# Altium PCB Analog Circuit.PcbDoc
Units mm, origin at the board's own origin, x right, y up, seen from the top; angles counter-clockwise.
Board outline 143.25 x 119.5 mm, 2 copper layers (Top Layer, Bottom Layer); 53 components, 17 nets, 152 pads, 34 vias.
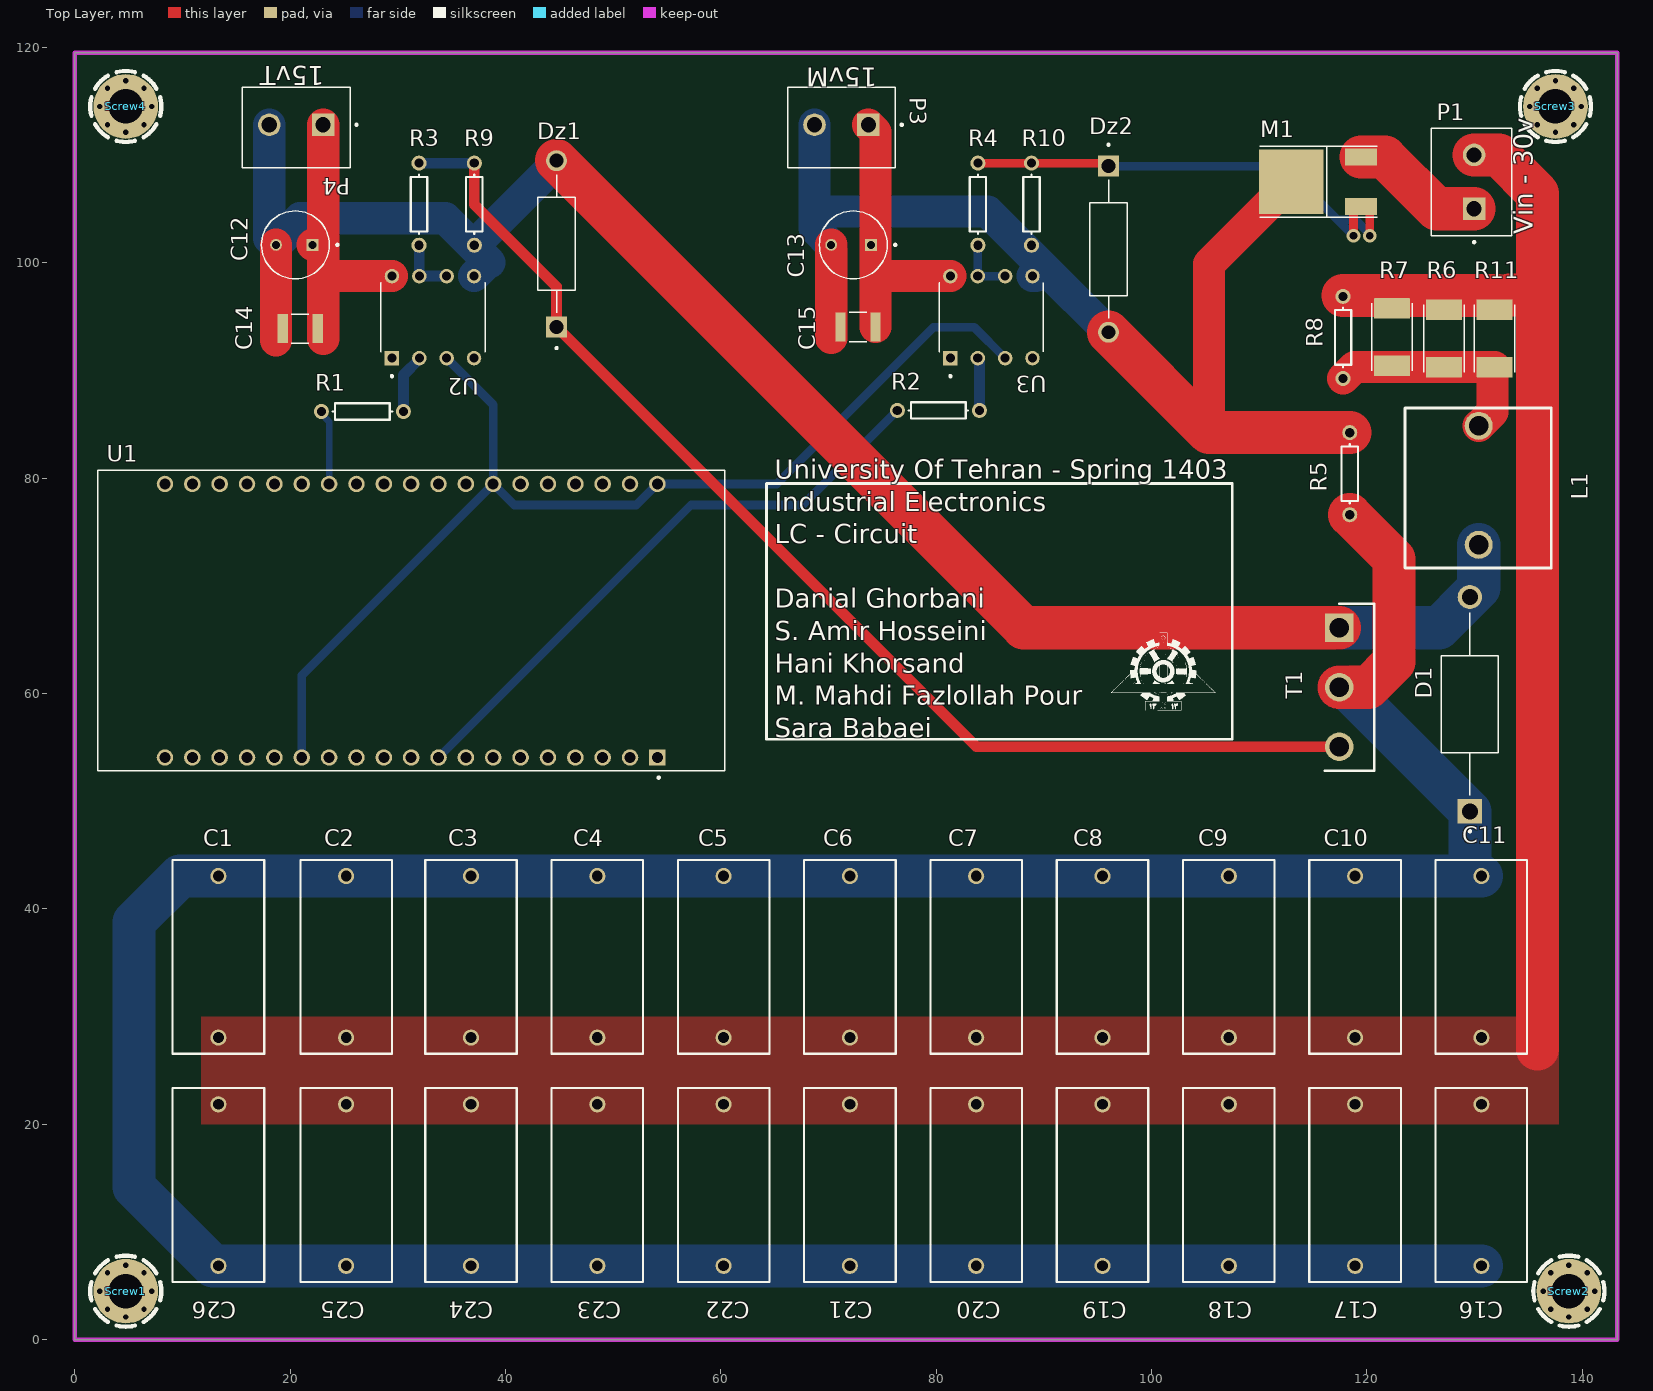
[diagram p0: Top Layer view]
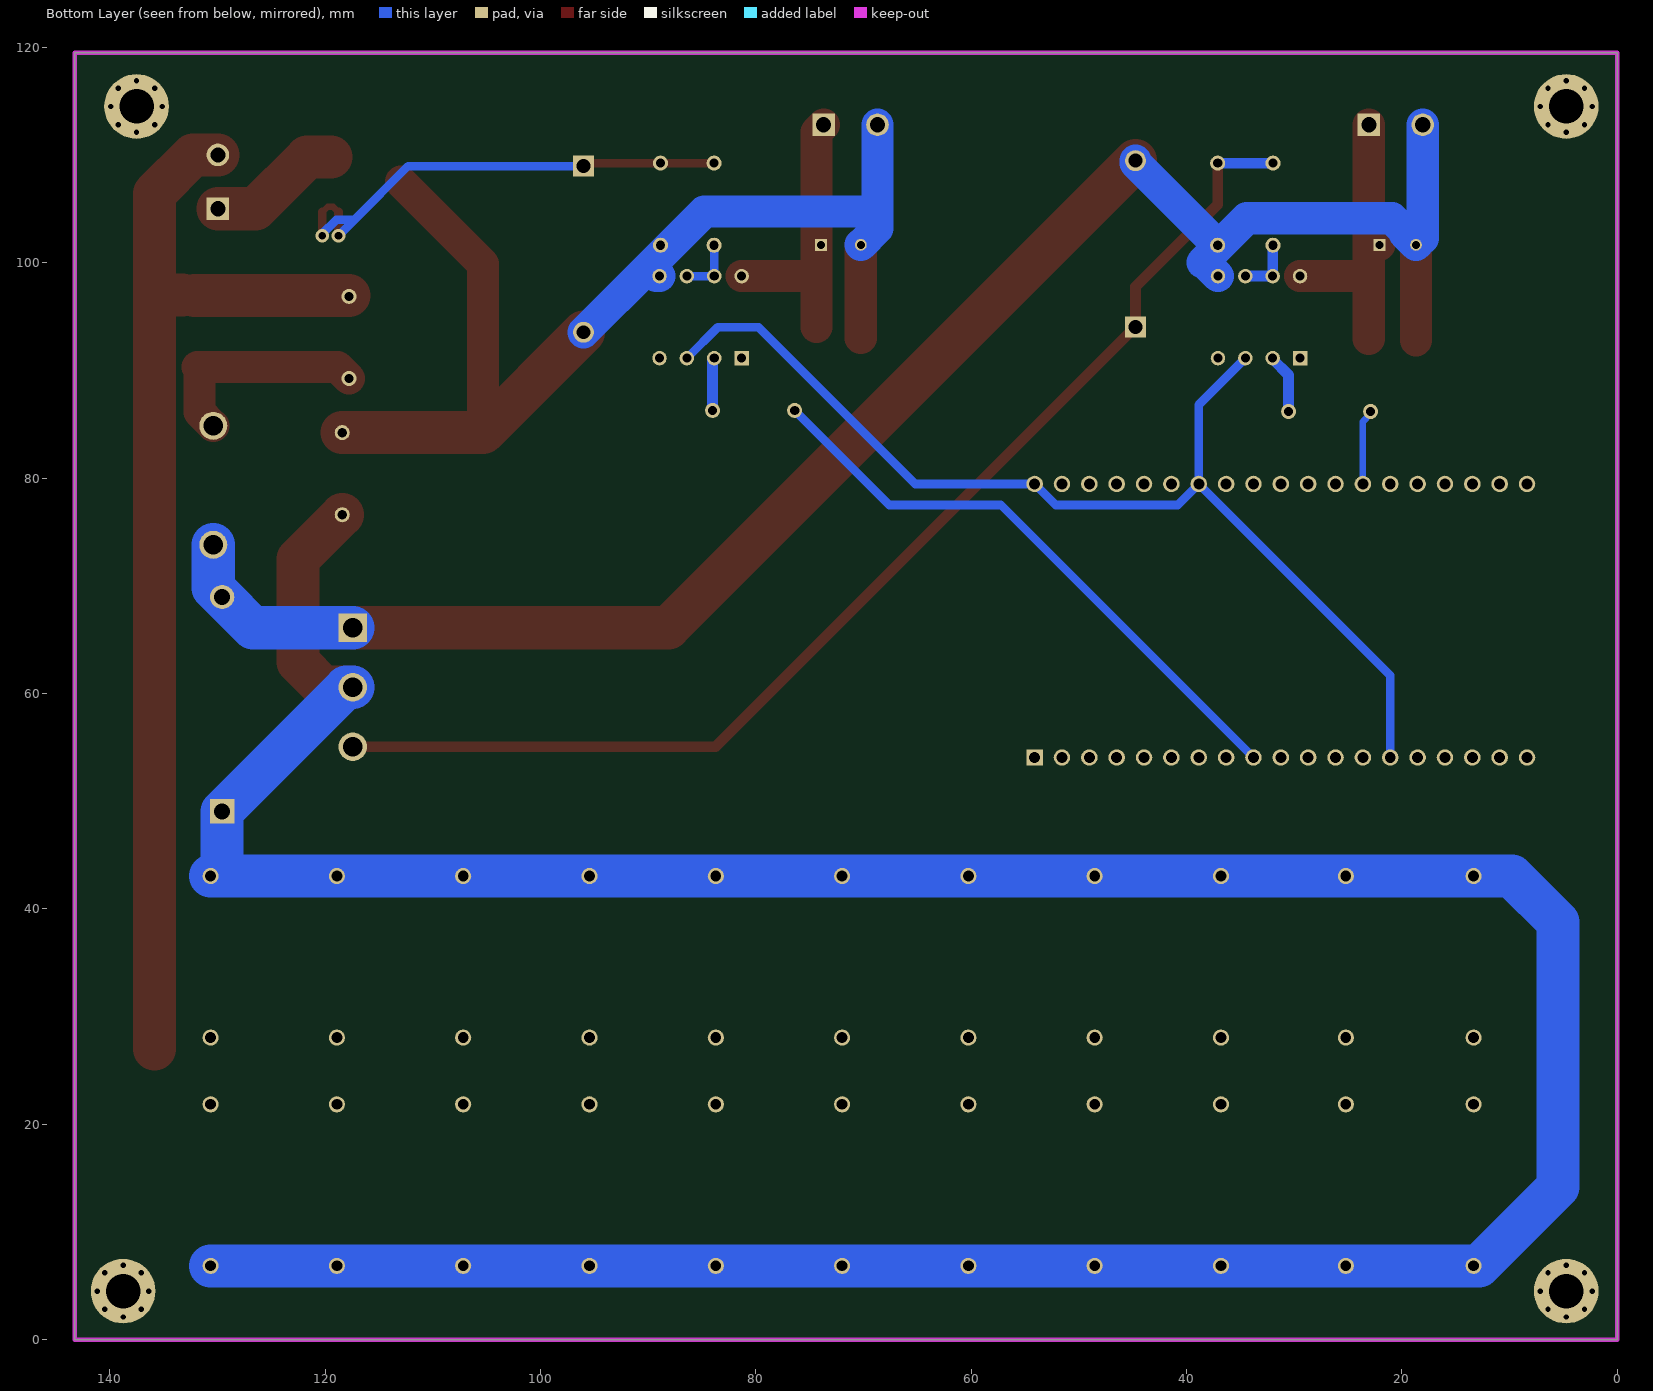
[diagram p1: Bottom Layer view, seen from below]
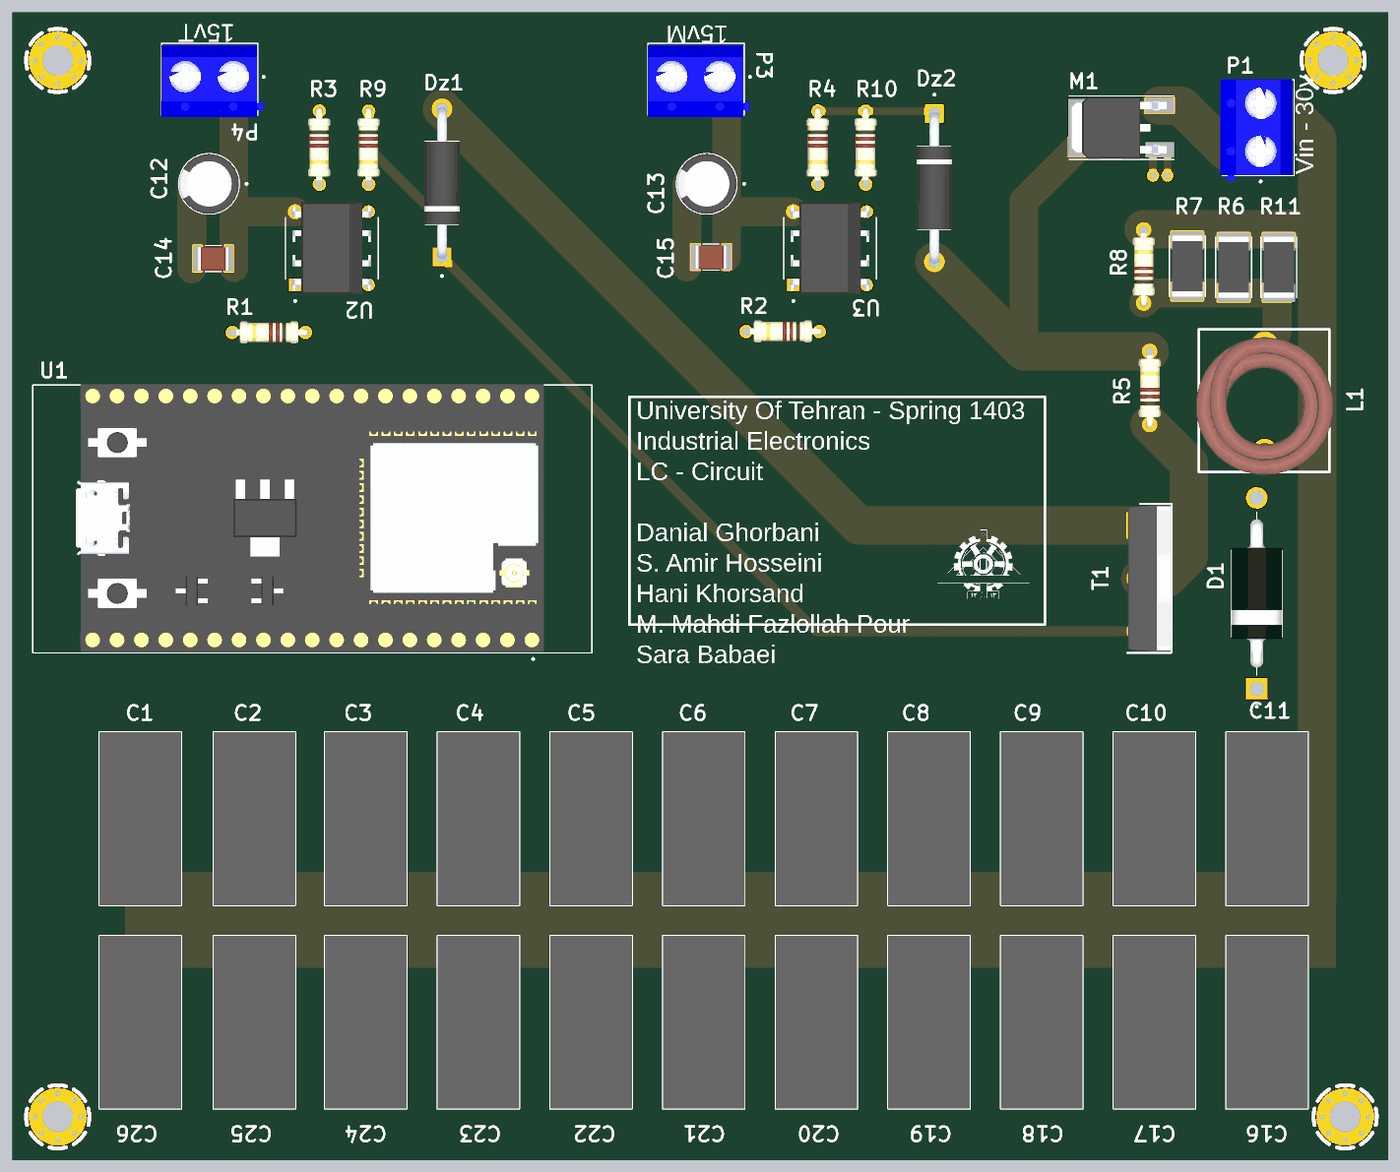
[diagram p2: 3D render of the assembled board from above, using the file's embedded part models]

## Layer stack, top to bottom
Top Solder: solder mask 0.0102, Solder Resist, Dk 3.5
Top Layer: signal copper 0.0356
Dielectric 1: dielectric 0.32, FR-4, Dk 4.8
Bottom Layer: signal copper 0.0356
Bottom Solder: solder mask 0.0102, Solder Resist, Dk 3.5

## Board outline
0,0 0,119.5 143.25,119.5 143.25,0

## Design rules (kind name [scope] priority, off if disabled: settings)
Clearance [All] p1: gap=0.3 ignorepadtopadclearanceinfootprint=FALSE
PlaneConnect [All] p1: planeconnectstyle=Direct reliefexpansion=0.508 reliefentries=4 reliefconductorwidth=0.254 reliefairgap=0.254
PolygonConnect [All] p1: connectstyle=Direct reliefconductorwidth=0.254 reliefentries=4 polygonreliefangle="90 Angle" airgapwidth=0.254
RoutingVias [All] p1: holewidth=0.711 width=1.27 viastyle="Through Hole" minholewidth=0.711 minwidth=1.27 maxholewidth=0.711 maxwidth=1.27
SolderMaskExpansion [All] p1: expansion=0.102 istentingtop=FALSE
Width Power [(InNet('Vin') OR InNet('+15V_iso1') OR InNet('+15V_iso2') OR InNet('Source_M') OR InNet('GND') OR InNet('Cathode_T') OR InNet('NetL1_2') OR InNet('LCT'))] p1: maxlimit=6 minlimit=3 preferedwidth=4
Width General [All] p2: maxlimit=1 minlimit=0.6 preferedwidth=0.8
29 further rules are at their usual default settings.

## Components (designator, comment, footprint, x,y, rotation, side; value= is the part's Value field where it differs from the comment)
C1 "6.8 uF" "63V MKT" 13.354,28.042 r90 top
C2 "6.8 uF" "63V MKT" 25.212,28.042 r90 top
C3 "6.8 uF" "63V MKT" 36.808,28.042 r90 top
C4 "6.8 uF" "63V MKT" 48.534,28.042 r90 top
C5 "6.8 uF" "63V MKT" 60.261,28.042 r90 top
C6 "6.8 uF" "63V MKT" 71.988,28.042 r90 top
C7 "6.8 uF" "63V MKT" 83.715,28.042 r90 top
C8 "6.8 uF" "63V MKT" 95.442,28.042 r90 top
C9 "6.8 uF" "63V MKT" 107.168,28.042 r90 top
C10 "6.8 uF" "63V MKT" 118.895,28.042 r90 top
C11 "6.8 uF" "63V MKT" 130.622,28.042 r90 top
C12 "100uF" "Cap 100uF"#1 20.5,101.65 r180 top
C13 "100uF" "Cap 100uF"#2 72.3,101.65 r180 top
C14 "100nf" "Cap 1210" 20.943,93.85 r0 top
C15 "100nf" "Cap 1210" 72.743,94 r0 top
C16 "6.8 uF" "63V MKT" 130.622,21.849 r270 top
C17 "6.8 uF" "63V MKT" 118.895,21.849 r270 top
C18 "6.8 uF" "63V MKT" 107.168,21.849 r270 top
C19 "6.8 uF" "63V MKT" 95.442,21.849 r270 top
C20 "6.8 uF" "63V MKT" 83.715,21.849 r270 top
C21 "6.8 uF" "63V MKT" 71.988,21.849 r270 top
C22 "6.8 uF" "63V MKT" 60.261,21.849 r270 top
C23 "6.8 uF" "63V MKT" 48.534,21.849 r270 top
C24 "6.8 uF" "63V MKT" 36.808,21.849 r270 top
C25 "6.8 uF" "63V MKT" 25.212,21.849 r270 top
C26 "6.8 uF" "63V MKT" 13.354,21.849 r270 top
D1 "SR360" SR360 129.55,59 r90 top
Dz1 "zener" zener 44.75,101.75 r270 top
Dz2 "zener" zener 96,101.25 r90 top
L1 "13.5 uH" Inductor 130.25,78.5 r90 top
M1 "20N06" 20N06 112.95,107.5 r90 top
P1 "Vin - 30v" Connector 129.95,107.5 r90 top
P3 "15vM" Connector 71.2,112.8 r180 top
P4 "15vT" Connector 20.575,112.8 r180 top
R1 "820" "Res DIP" 26.772,86.15 r180 top
R2 "820" "Res DIP" 80.25,86.25 r180 top
R3 "1k" "Res DIP" 32.005,105.475 r270 top
R4 "15R" "Res DIP" 83.9,105.475 r270 top
R5 "Res1" "Res DIP" 118.375,80.35 r90 top value=10R
R6 "0.01 R" "Res 2512" 127.147,92.935 r90 top
R7 "0.01 R" "Res 2512" 122.321,93.062 r90 top
R8 "0.1 R" "Res DIP" 117.75,93 r90 top
R9 "20k" "Res DIP" 37.137,105.475 r270 top
R10 "20k" "Res DIP" 88.875,105.475 r270 top
R11 "0.01 R" "Res 2512" 131.846,92.935 r90 top
Screw1 "Screw" Screw 4.75,4.5 r0 top
Screw2 "Screw" Screw 138.75,4.5 r0 top
Screw3 "Screw" Screw 137.5,114.5 r0 top
Screw4 "Screw" Screw 4.75,114.5 r0 top
T1 "BTW68" BTW68 117.425,66.1 r270 top
U1 "ESP" ESP 31.25,66.75 r270 top
U2 "TLP250" TLP250 33.25,94.94 r90 top
U3 "TLP250" TLP250 85.105,94.94 r90 top

## Footprints (in the part's own frame and the unit in brackets; to place one, negate y for a bottom-side part, rotate by r counter-clockwise, add the part's x,y. Pads: shape width x height; smd on the part's side, far side on the other; paste and mask are expansions set on the pad)
20N06 [mm]
  rect 1.6x3 smd: 1(-2.3,-6.5) 3(2.3,-6.5)
  rect 6x6 smd: 2(0,0)
  silkscreen extent -3.3,-8 3.3,2.92, body extent -3.27,-7.24 3.27,2.67, height 2.39
"63V MKT" [mm]
  round 1.5 hole 1: 1(0,0) 2(15,0)
  silkscreen extent -1.5,-4.25 16.5,4.25, body extent -1.5,-4.25 16.5,4.25, height 14.6
BTW68 [mm]
  rect 2.655x2.655 hole 1.77: 1(0,0)
  round 2.655 hole 1.77: 2(5.525,0) 3(11.05,0)
  silkscreen extent -2.22,-1.35 13.28,3.25, body extent -2.12,-1.3 13.18,3.2, height 21.54
"Cap 100uF"#1 [mm]
  rect 1.1x1.1 hole 0.75: 1(-1.6,0)
  round 1.1 hole 0.75: 2(1.8,0)
  silkscreen extent -4,-3.15 3.15,3.15, body extent -3.15,-3.15 3.15,3.15, height 11.2
"Cap 100uF"#2 [mm]
  rect 1.1x1.1 hole 0.75: 1(-1.65,0)
  round 1.1 hole 0.75: 2(2.05,0)
  silkscreen extent -4,-3.15 3.15,3.15, body extent -3.15,-3.15 3.15,3.15, height 11.2
"Cap 1210" [mm] "SMD Ceramic 1210"
  rect 0.96x2.72 smd: 1(-1.625,0.025) 2(1.625,0.025)
  silkscreen extent -0.82,-1.32 0.82,1.38, body extent -1.6,-1.25 1.6,1.25, height 2.2
Connector [mm]
  rect 2.1x2.1 hole 1.4: 1(-2.5,0)
  round 2.1 hole 1.4: 2(2.5,0)
  silkscreen extent -5.7,-3.5 5,4, body extent -5.55,-3.31 5.05,4.19, height 10
ESP [mm]
  rect 1.53x1.53 / inner round 1.53 / far side rect 1.53x1.53 hole 1.02: 1(12.7,22.86)
  round 1.53 hole 1.02: 2(12.7,20.32) 3(12.7,17.78) 4(12.7,15.24) 5(12.7,12.7) 6(12.7,10.16) 7(12.7,7.62) 8(12.7,5.08) 9(12.7,2.54) 10(12.7,0) 11(12.7,-2.54) 12(12.7,-5.08) 13(12.7,-7.62) 14(12.7,-10.16) 15(12.7,-12.7) 16(12.7,-15.24) 17(12.7,-17.78) 18(12.7,-20.32) 19(12.7,-22.86) 20(-12.7,-22.86) 21(-12.7,-20.32) 22(-12.7,-17.78) 23(-12.7,-15.24) 24(-12.7,-12.7) 25(-12.7,-10.16) 26(-12.7,-7.62) 27(-12.7,-5.08) 28(-12.7,-2.54) 29(-12.7,0) 30(-12.7,2.54) 31(-12.7,5.08) 32(-12.7,7.62) 33(-12.7,10.16) 34(-12.7,12.7) 35(-12.7,15.24) 36(-12.7,17.78) 37(-12.7,20.32) 38(-12.7,22.86)
  silkscreen extent -13.95,-29.09 14.67,29.11, body extent -14.06,-24.63 13.84,24.12, height 7.85
Inductor [mm]
  round 2.6 hole 1.8: 1(-4.699,-0.127) 2(6.35,-0.127)
  silkscreen extent -6.86,-6.86 8,6.73, body extent -7.17,-7.29 7.2,7.04, height 15.09
"Res 2512" [mm]
  rrect7% 1.9x3.37 smd: 1(-2.635,0) 2(2.685,0)
  silkscreen extent -3.12,-1.87 3.18,1.87, body extent -3.15,-1.58 3.2,1.58, height 0.7
"Res DIP" [mm]
  round 1.4 hole 0.85: 1(-3.76,-0.026) 2(3.86,-0.026)
  silkscreen extent -2.72,-0.79 2.82,0.74, body extent -4.12,-1.19 4.19,1.1, height 2.74
Screw [mm]
  round 6 / inner round 3.5 / far side round 6 hole 3.2 mask+0.1: 1(0,0)
  Top Layer pour cut-out: 0,3.5 -0.229,3.5 -0.684,3.44 -1.127,3.321 -1.551,3.146 -1.949,2.916 -2.313,2.637 -2.637,2.313 -2.916,1.949 -3.146,1.551 -3.321,1.127 -3.44,0.684 -3.5,0.229 -3.5,0 -3.5,0 -3.5,-0.229 -3.44,-0.684 -3.321,-1.127 -3.146,-1.551 -2.916,-1.949 -2.637,-2.313 -2.313,-2.637 -1.949,-2.916 -1.551,-3.146 -1.127,-3.321 -0.684,-3.44 -0.229,-3.5 0,-3.5 0.229,-3.5 0.684,-3.44 1.127,-3.321 1.551,-3.146 1.949,-2.916 2.313,-2.637 2.637,-2.313 2.916,-1.949 3.146,-1.551 3.321,-1.127 3.44,-0.684 3.5,-0.229 3.5,0 3.5,0.229 3.44,0.684 3.321,1.127 3.146,1.551 2.916,1.949 2.637,2.313 2.313,2.637 1.949,2.916 1.551,3.146 1.127,3.321 0.684,3.44 0.229,3.5 0,3.5
  Bottom Layer pour cut-out: 0,3.5 -0.229,3.5 -0.684,3.44 -1.127,3.321 -1.551,3.146 -1.949,2.916 -2.313,2.637 -2.637,2.313 -2.916,1.949 -3.146,1.551 -3.321,1.127 -3.44,0.684 -3.5,0.229 -3.5,0 -3.5,0 -3.5,-0.229 -3.44,-0.684 -3.321,-1.127 -3.146,-1.551 -2.916,-1.949 -2.637,-2.313 -2.313,-2.637 -1.949,-2.916 -1.551,-3.146 -1.127,-3.321 -0.684,-3.44 -0.229,-3.5 0,-3.5 0.229,-3.5 0.684,-3.44 1.127,-3.321 1.551,-3.146 1.949,-2.916 2.313,-2.637 2.637,-2.313 2.916,-1.949 3.146,-1.551 3.321,-1.127 3.44,-0.684 3.5,-0.229 3.5,0 3.5,0.229 3.44,0.684 3.321,1.127 3.146,1.551 2.916,1.949 2.637,2.313 2.313,2.637 1.949,2.916 1.551,3.146 1.127,3.321 0.684,3.44 0.229,3.5 0,3.5
  silkscreen extent -3.3,-3.3 3.3,3.3
SR360 [mm] "Schottkey Diode"
  round 2.25 hole 1.5: A(9.95,0)
  rect 2.25x2.25 / inner round 2.25 / far side rect 2.25x2.25 hole 1.5: K(-9.95,0)
  silkscreen extent -11.9,-2.65 8.47,2.65, body extent -7.73,-2.64 7.73,2.64, height 5.65
TLP250 [mm]
  rect 1.348x1.348 / inner round 1.348 / far side rect 1.348x1.348 hole 0.84: 1(-3.81,3.785)
  round 1.348 hole 0.84: 2(-3.81,1.245) 3(-3.81,-1.295) 4(-3.81,-3.835) 5(3.81,-3.835) 6(3.81,-1.295) 7(3.81,1.245) 8(3.81,3.785)
  silkscreen extent -5.58,-4.86 3.2,4.8, body extent -4.83,-4.31 4.83,4.26, height 4.85
zener [mm]
  rect 1.94x1.94 / inner round 1.94 / far side rect 1.94x1.94 hole 1.29: 1(7.715,0)
  round 1.94 hole 1.29: 2(-7.715,0)
  silkscreen extent -6.43,-1.75 9.78,1.75, body extent -7.87,-1.84 7.87,1.84, height 3.68

## Part data
C1 C2 C3 C4 C5 C6 C7 C8 C9 C10 C11 C16 C17 C18 C19 C20 C21 C22 C23 C24 C25 C26: library part "6.8uF Cap MKT", "6.8uF Cap MKT"
C12 C13: library part Cap-Polar, "Polar Capacitor", Voltage=25V, Adding Date=1387/12/20, Designer="Saeid Jorablo", Organazation=ControTec
C14 C15: library part "CAP SMD 0805", "CAP 0805", Data=16-12-2016, Desc.="CAP SMD 0805", Designer="Abbas Basereh"
D1: library part K16
L1: library part "0805 inductor", "10uH"
P1 P3 P4: library part Connector
R1 R2 R3 R4 R8 R9 R10: library part Resistor, "Resistor", Power="1/8 W", TOLERANCE=5%
R5: "Resistor", LatestRevisionDate=17-Jul-2002, LatestRevisionNote="Re-released for DXP Platform.", PackageDescription="Axial Device, Thru-Hole; 2 Leads; 0.3 in Pin Spacing", PackageReference=AXIAL-0.3, Published=8-Jun-2000, Publisher="Altium Limited"
R6 R7 R11: library part Resistor, "Resistor 2512 SMD", Power="1/8 W", TOLERANCE=5%
Dz1 Dz2: Vz="20 V"

## Via types
v1: diameter 0.8, hole 0.5, Top Layer to Bottom Layer, 32 vias
v2: diameter 1.27, hole 0.711, Top Layer to Bottom Layer, 2 vias

## Nets (pads, with @x,y where several pads share a name; then routed paths per layer and width w, separated by ;. In a path a pad name is that pad's centre, name@x,y a point inside that pad or via, vN(x,y) a via of type N, cw(c..) or ccw(c..) an arc to the next point about the centre after c; other vN are vias at no path point)
+15V_iso1: C12.1 C14.2 P4.1 U2.8 | length 26.4
  Top Layer w3: C12.1 C12.1@22.15,101.65 ; 23.075,92.925 23.075,99 ; P4.1 23.075,99 ; U2.8 23.325,98.75 23.075,99
+15V_iso2: C13.1 C15.2 P3.1 U3.8 | length 26.2
  Top Layer w3: P3.1 74.368,112.132 74.368,99.25 ; C15.2 74.368,99.25 ; U3.8 74.868,98.75 74.368,99.25
Cathode_T: C12.2 C14.1 D1.A Dz1.2 L1.1 P4.2 R9.2 T1.1 U2.5 | length 165
  Top Layer w3: 18.7,92.8 C12.2
  Top Layer w4: Dz1.2 88.115,66.1 T1.1
  Bottom Layer w3: P4.2 18.075,102.275 C12.2 19.75,102.7 19.75,102.946 20.919,104.115 34.42,104.115 38.517,100.018 38.353,100.018 U2.5 ; R9.2 44.75,109.254 Dz1.2
  Bottom Layer w4: T1.1 126.7,66.1 D1.A 130.377,69.777 L1.1
D_GND: U1.14 U1.32 U1.38 U2.3 U3.3 | length 102.6
  Bottom Layer w0.8: U1.14 21.09,61.67 U1.32 ; U2.3 38.87,86.805 U1.32 ; U3.3 86.333,91.197 83.53,94 79.75,94 65.2,79.45 U1.38 52.16,77.5 40.82,77.5 U1.32
DRV_S: R2.2 U1.9 | length 55.9
  Bottom Layer w0.8: U1.9 57.24,77.5 67.614,77.5 R2.2
DRV_T: R1.2 U1.26 | length 7
  Bottom Layer w0.6: R1.2 22.911,85.959 23.63,85.241 U1.26
Gate_M: Dz2.1 M1.1 R4.1 R10.1 | length 47.7
  Top Layer w0.6: M1.1@118.75,104.7 119.25,105.2 M1.1 119.75,105.2 M1.1@120.25,104.7
  Top Layer w0.8: R4.1 R10.1 95.73,109.235 Dz2.1 ; v2(118.75,102.5) M1.1@118.75,104.7 ; v2(120.25,102.5) M1.1@120.25,104.7
  Bottom Layer w0.8: Dz2.1 112.285,108.965 117.285,103.965 ; v2(118.75,102.5) 117.285,103.965 ; v2(120.25,102.5) 120.25,102.681 118.966,103.965 117.285,103.965
Gate_T: Dz1.1 R3.1 R9.1 T1.3 | length 112.5
  Top Layer w1: R9.1 37.111,105.4 44.75,97.762 Dz1.1 ; Dz1.1@44.535,94.035 Dz1.1 ; T1.3 86.95,55.05 83.735,55.05 Dz1.1
  Bottom Layer w1: R3.1 R9.1
GND: C1.1 C2.1 C3.1 C4.1 C5.1 C6.1 C7.1 C8.1 C9.1 C10.1 C11.1 C16.1 C17.1 C18.1 C19.1 C20.1 C21.1 C22.1 C23.1 C24.1 C25.1 C26.1 P1.2 R6.2 R7.2 R8.2 R11.2 | length 103.7
  Top Layer w4: R8.2@117.776,96.935 132.092,96.935 ; P1.2 132.25,110 135.831,106.419 135.831,97 ; 133.226,97 135.831,97 ; 135.831,27 135.831,33.25 135.831,97
LCT: C1.2 C2.2 C3.2 C4.2 C5.2 C6.2 C7.2 C8.2 C9.2 C10.2 C11.2 C16.2 C17.2 C18.2 C19.2 C20.2 C21.2 C22.2 C23.2 C24.2 C25.2 C26.2 D1.K R5.1 T1.2 | length 323.9
  Top Layer w4: T1.2 120.157,60.575 122.5,62.918 122.5,72.491 R5.1
  Bottom Layer w4: T1.2 118.025,60.575 D1.K 129.55,43.042 ; C16.2 C17.2 C18.2 C19.2 C20.2 C21.2 C22.2 C23.2 C24.2 C25.2 C26.2 12.836,6.849 5.5,14.185 5.5,38.75 9.792,43.042 C2.2 C3.2 C4.2 C5.2 C6.2 C7.2 C8.2 C9.2 C10.2 129.55,43.042 ; C11.2 129.55,43.042
NetL1_2: L1.2 R6.1 R7.1 R8.1 R11.1 | length 20.6
  Top Layer w3: R8.1 118.836,90.3 R6.1 R11.1 131.661,90.115 131.661,86.134 L1.2
NetR1_1: R1.1 U2.2 | length 5.6
  Bottom Layer w1: R1.1 30.531,89.562 32.005,91.036 U2.2
NetR2_1: R2.1 U3.2 | length 4.9
  Bottom Layer w1: U3.2 83.86,91.036 84.01,90.886 R2.1
NetR3_2: R3.2 U2.6 U2.7 | length 5.4
  Bottom Layer w1: R3.2 31.992,101.602 31.992,98.763 U2.7 U2.6
PWM2_out: R4.2 U3.6 U3.7 | length 5.4
  Bottom Layer w0.8: R4.2 83.867,101.608 83.867,98.757 U3.7 U3.6
Source_M: C13.2 C15.1 Dz2.2 M1.2 P3.2 R5.2 R10.2 U3.5 | length 106.5
  Top Layer w3: 70.25,93 C13.2 ; 105.325,84.21 105.325,99.875 M1.2
  Top Layer w4: Dz2.2 105.325,84.21 R5.2
  Bottom Layer w3: P3.2 68.7,104.75 ; C13.2 68.7,103.2 68.7,104.75 ; U3.5 89.25,98.75 90.018,99.517 ; Dz2.2 90.018,99.517 ; 68.7,104.75 84.785,104.75 90.018,99.517
Vin: M1.3 P1.1 | length 12.5
  Top Layer w4: M1.3 121.65,109.8 126.45,105 P1.1
pads on no net: Screw1.1 Screw2.1 Screw3.1 Screw4.1 U1.1 U1.2 U1.3 U1.4 U1.5 U1.6 U1.7 U1.8 U1.10 U1.11 U1.12 U1.13 U1.15 U1.16 U1.17 U1.18 U1.19 U1.20 U1.21 U1.22 U1.23 U1.24 U1.25 U1.27 U1.28 U1.29 U1.30 U1.31 U1.33 U1.34 U1.35 U1.36 U1.37 U2.1 U2.4 U3.1 U3.4
copper on no net:
  other v1: 4.75,2.1 138.75,2.1 3.053,2.803 6.447,2.803 137.053,2.803 140.447,2.803 2.35,4.5 7.15,4.5 136.35,4.5 141.15,4.5 3.053,6.197 6.447,6.197 137.053,6.197 140.447,6.197 4.75,6.9 138.75,6.9 4.75,112.1 137.5,112.1 3.053,112.803 6.447,112.803 135.803,112.803 139.197,112.803 2.35,114.5 7.15,114.5 135.1,114.5 139.9,114.5 3.053,116.197 6.447,116.197 135.803,116.197 139.197,116.197 4.75,116.9 137.5,116.9

## Polygon pours and split planes (outlines as drawn)
GND on Top Layer "GND_L01_P000" (solid, remove dead copper, pour order 0): 11.75,30 11.75,20 137.8,20 137.8,30 133.75,30

## Keep-outs
Keep-Out Layer:
  the board outline again, w0.4

## Silkscreen, mask and mechanical layers (free items; w line width, h text height)
Top Overlay:
  drawing of 15 lines, arcs and shapes, not listed
  text "University Of Tehran - Spring 1403 / Industrial Electronics / LC - Circuit /  / Danial Ghorbani / S. Amir Hosseini / Hani Khorsand / M. Mahdi Fazlollah Pour / Sara Babaei" at 65,55.334 h3